# Altium PCB Grabber_DIOT.PCBDOC (part 3 of 7)
Units mm, origin at the board's own origin, x right, y up, seen from the top; angles counter-clockwise.
Board outline 221.14 x 100 mm, 4 copper layers (TopLayer, MidLayer1, Internal layer GND, Bottom Layer), stack 1.607 mm thick; 234 components, 170 nets, 1025 pads, 389 vias.
Unrouted connection lines stored in the file: 2.
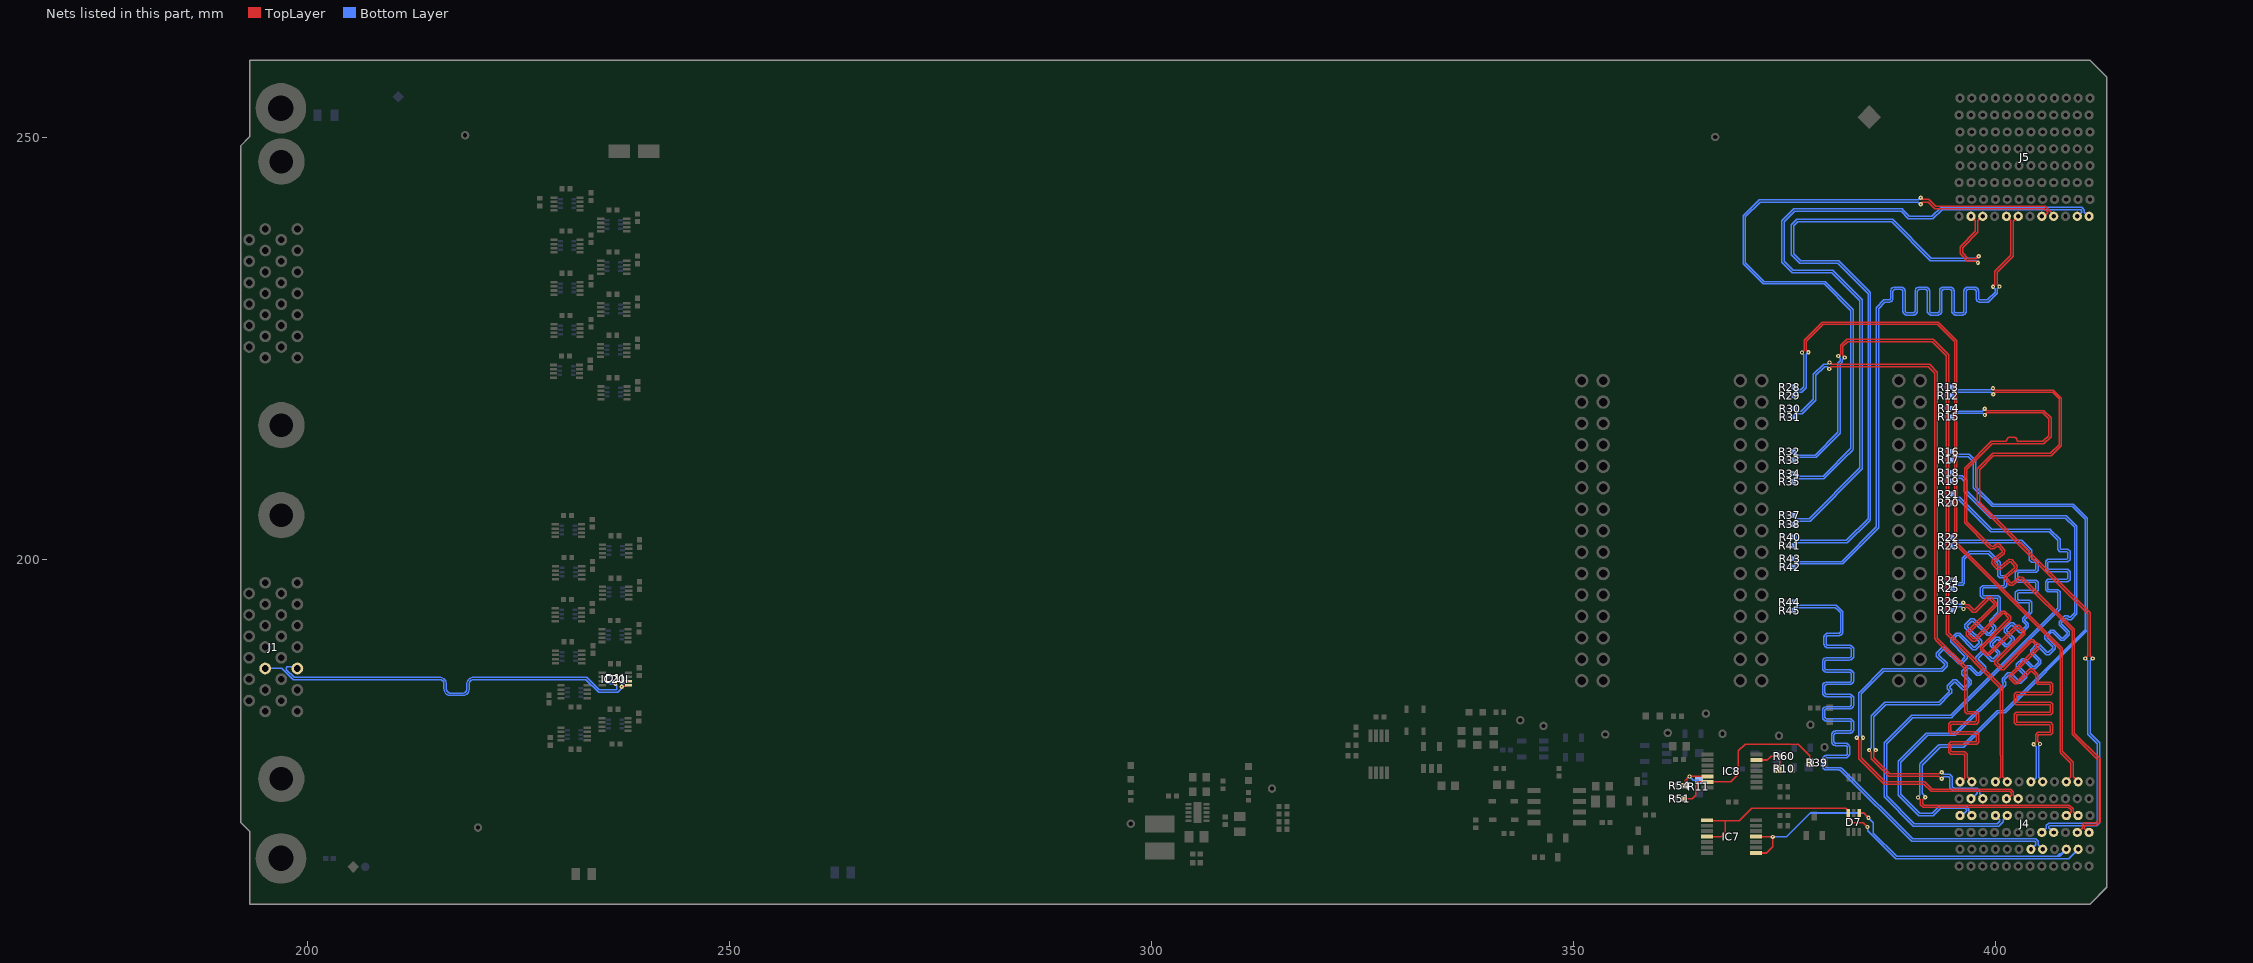
[diagram p4: the nets of this part, all layers, seen from the top]

## Via types
v1: diameter 0.5, hole 0.2, TopLayer to Bottom Layer, tented both sides, 374 vias
v2: diameter 0.8, hole 0.5, TopLayer to Bottom Layer, tented both sides, 15 vias

## Nets (pads, with @x,y where several pads share a name; then routed paths per layer and width w, separated by ;. In a path a pad name is that pad's centre, name@x,y a point inside that pad or via, vN(x,y) a via of type N, cw(c..) or ccw(c..) an arc to the next point about the centre after c; other vN are vias at no path point) (continued)
BP_IO.LVDS_P4: (continued)
  Bottom Layer w0.152: R20.2@394.945,206.732 395.158,206.946 395.158,206.996 395.248,207.085 395.709,207.085 399.487,203.307 406.388,203.307 407.413,202.282 407.413,201.457 407.413,201.183 407.668,200.928 408.509,200.928 408.6,200.837 408.6,200.105 408.509,200.014 406.221,200.014 405.966,199.759 405.966,198.796 406.221,198.541 408.509,198.541 408.6,198.449 408.6,197.718 408.509,197.626 406.234,197.626 405.979,197.371 405.979,196.408 406.234,196.153 407.321,196.153 407.413,196.062 407.413,194.244 406.738,193.569 394.712,181.543 390.122,181.543 386.853,178.273 386.853,171.867 390.304,168.415 400.415,168.415 400.932,168.933 400.932,169.158 J4.H4@401.432,169.657
BP_IO.LVDS_P5: J4.J5 R22.2 | length 84.8
  TopLayer w0.152: v1(385.853,177.409) 385.853,177.4 385.598,177.146 385.598,176.509 387.509,174.598 393.403,174.598 393.585,174.78 v1(393.666,174.78)
  Bottom Layer w0.152: v1(385.853,177.409) 385.853,177.418 385.598,177.672 385.598,181.368 387.034,182.804 393.424,182.804 394.648,184.028 394.841,184.221 394.841,184.582 394.625,184.799 394.625,184.928 395.142,185.445 395.272,185.445 396.151,184.566 396.511,184.566 397.192,185.247 397.192,185.608 396.313,186.487 396.313,186.616 396.83,187.133 396.96,187.133 397.839,186.254 398.2,186.254 398.881,186.935 398.881,187.296 398.002,188.175 398.002,188.304 398.519,188.822 398.648,188.822 399.527,187.943 399.888,187.943 400.569,188.624 400.569,188.984 399.69,189.863 399.69,189.993 400.207,190.51 400.336,190.51 401.215,189.631 401.576,189.631 402.257,190.312 402.257,190.673 401.378,191.552 401.378,191.681 401.895,192.198 402.025,192.198 402.904,191.319 403.264,191.319 403.945,192 403.945,192.361 403.528,192.779 403.528,192.908 403.658,193.038 404.336,193.717 404.336,194.637 404.336,194.911 404.081,195.166 402.78,195.166 402.689,195.257 402.689,195.989 402.78,196.08 404.856,196.08 405.111,196.335 405.111,197.298 404.856,197.553 402.78,197.553 402.689,197.645 402.689,198.376 402.78,198.468 404.856,198.468 405.111,198.723 405.111,199.686 404.856,199.941 404.428,199.941 404.336,200.032 404.336,200.357 404.336,201.073 403.155,202.254 395.345,202.254 395.174,202.425 395.158,202.425 394.945,202.639 R22.2@394.945,202.659 ; v1(393.666,174.78) 393.699,174.78 393.929,174.551 394.648,174.551 394.943,174.256 394.943,173.071 395.148,172.867 397.875,172.867 398.185,172.557 398.185,172.22 398.532,171.874 J4.J5@398.532,171.657
BP_IO.LVDS_P6: J4.G5 R24.2 | length 84.8
  TopLayer w0.152: v1(384.354,178.864) 384.354,178.843 384.112,178.6 384.112,176.506 386.982,173.637 391.683,173.637 392.519,172.8 401.873,172.8 402.172,172.502 402.172,172.072 402.586,171.657 J4.G5@402.732,171.657
  Bottom Layer w0.152: v1(384.354,178.864) 384.354,178.884 384.112,179.127 384.112,184.07 386.783,186.741 393.71,186.741 394.106,187.137 394.3,187.331 394.3,187.692 393.327,188.665 393.327,188.794 393.844,189.311 393.973,189.311 395.659,187.625 396.02,187.625 396.701,188.306 396.701,188.667 395.015,190.353 395.015,190.482 395.532,191 395.662,191 397.348,189.314 397.708,189.314 398.389,189.995 398.389,190.355 396.703,192.041 396.703,192.171 397.221,192.688 397.35,192.688 399.036,191.002 399.397,191.002 400.078,191.683 400.078,192.044 399.61,192.512 399.61,192.641 400.454,193.485 400.597,193.628 400.597,195.179 400.597,195.452 400.342,195.708 398.615,195.708 398.524,195.799 398.524,196.53 398.615,196.622 401.12,196.622 401.375,196.877 401.375,197.84 401.12,198.095 400.688,198.095 400.597,198.187 400.597,199.676 400.597,199.693 399.311,200.978 396.938,200.978 396.078,200.117 396.078,197.277 396.024,197.223 395.248,197.223 395.158,197.313 395.158,197.352 R24.2@394.945,197.566
BP_IO.LVDS_P7: J4.E6 R26.2 | length 85.1
  TopLayer w0.152: v1(396.227,194.877) 396.247,194.877 396.49,194.634 396.847,194.634 397.338,194.143 397.45,194.031 397.579,194.031 399.115,195.566 399.475,195.566 400.156,194.886 400.156,194.525 396.869,191.237 396.869,191.108 397.386,190.591 397.515,190.591 400.803,193.878 401.164,193.878 401.845,193.197 401.845,192.836 398.557,189.549 398.557,189.42 399.074,188.902 399.204,188.902 402.491,192.19 402.852,192.19 403.533,191.509 403.533,191.148 400.245,187.861 400.245,187.731 400.763,187.214 400.892,187.214 404.18,190.502 404.54,190.502 405.221,189.821 405.221,189.46 401.934,186.172 401.934,186.043 402.451,185.526 402.58,185.526 404.087,187.033 404.448,187.033 404.888,186.593 405.072,186.409 405.072,185.717 405.072,185.559 405.164,185.468 406.562,185.468 406.817,185.213 406.817,184.25 406.562,183.994 402.633,183.994 402.541,183.903 402.541,183.171 402.633,183.08 406.562,183.08 406.817,182.825 406.817,181.862 406.562,181.607 402.633,181.607 402.541,181.515 402.541,180.784 402.633,180.692 406.562,180.692 406.817,180.437 406.817,179.474 406.562,179.219 405.164,179.219 405.072,179.128 405.072,178.767 405.072,178.471 405.32,178.223 v1(405.32,178.129) ; J4.E6@405.555,173.982 405.555,173.735 J4.E6@405.632,173.657
  Bottom Layer w0.152: R26.2@394.859,195.11 395.301,194.668 395.964,194.668 396.172,194.877 v1(396.227,194.877) ; v1(405.32,178.129) 405.32,178.035 405.174,177.89 405.174,174.174 405.364,173.985 405.54,173.985 405.54,173.749 405.632,173.749 J4.E6@405.632,173.657
BP_IO.LVDS_P8: J4.B6 R28.2 | length 85.3
  TopLayer w0.152: v1(377.114,224.522) 377.114,224.547 377.353,224.786 377.353,225.985 379.497,228.13 393.256,228.13 395.467,225.919 395.467,201.975 407.967,189.475 407.967,177.258 409.241,175.984 409.241,174.248 J4.B6@409.832,173.657
  Bottom Layer w0.152: R28.2@376.146,220.417 376.351,220.212 376.351,220.187 376.441,220.098 376.974,220.098 377.333,220.457 377.333,222.646 377.34,222.653 377.34,224.259 377.114,224.485 v1(377.114,224.522)
BP_IO.LVDS_P9: J4.K6 R30.2 | length 84.3
  TopLayer w0.152: v1(380.362,223.347) 380.408,223.347 380.625,223.13 386.236,223.13 392.222,223.13 393.157,222.194 393.157,190.66 396.674,187.143 396.674,182.373 396.674,182.064 396.765,181.972 397.799,181.972 398.054,181.717 398.054,180.754 397.799,180.499 394.853,180.499 394.762,180.408 394.762,179.676 394.853,179.585 397.799,179.585 398.054,179.33 398.054,178.367 397.799,178.112 394.853,178.112 394.762,178.02 394.762,177.289 394.853,177.197 396.418,177.197 396.674,176.942 396.674,176.668 ; 396.675,176.667 396.675,174.263 397.232,173.706 J4.K6@397.232,173.657
  Bottom Layer w0.152: R30.2@375.974,217.888 376.179,217.888 376.399,217.668 376.399,217.626 376.488,217.536 377.04,217.536 378.471,218.967 378.471,221.918 379.672,223.12 380.099,223.12 380.326,223.347 v1(380.362,223.347)
BP_IO.LVDS_P10: J4.H6 R32.2 | length 84.5
  TopLayer w0.152: v1(381.401,224.1) 381.416,224.1 381.679,224.363 381.679,225.372 382.39,226.083 392.637,226.083 394.493,224.227 394.493,191.294 400.908,184.879 400.908,176.934 400.912,176.93 400.912,174.252 401.432,173.732 J4.H6@401.432,173.657
  Bottom Layer w0.152: R32.2@376.127,212.789 376.127,212.769 376.341,212.555 376.356,212.555 376.545,212.367 378.668,212.367 381.354,215.052 381.354,223.276 381.621,223.543 381.621,223.821 381.401,224.041 v1(381.401,224.1)
BP_IO.LVDS_P11: J5.D1 R34.2 | length 84.2
  TopLayer w0.152: v1(391.173,242.87) 391.247,242.87 391.436,242.681 392.118,242.681 392.196,242.603 392.201,242.603 392.964,241.841 405.944,241.841 405.946,241.839 406.533,241.252 406.535,241.252 406.931,240.856 J5.D1@406.931,240.658
  Bottom Layer w0.152: R34.2@376.098,210.198 376.098,210.184 376.432,209.849 379.603,209.849 382.915,213.162 382.915,229.488 379.752,232.652 372.502,232.652 370.124,235.03 370.124,240.733 372.02,242.629 390.88,242.629 391.079,242.827 391.079,242.87 v1(391.173,242.87)
BP_IO.LVDS_P12: J5.A1 R37.2 | length 84.7
  Bottom Layer w0.152: R37.2@376.268,205.201 376.366,205.103 376.366,204.925 376.455,204.835 377.953,204.835 383.967,210.849 383.967,230.631 380.627,233.972 375.952,233.972 374.717,235.206 374.717,240.131 376.118,241.532 376.235,241.532 388.852,241.532 388.969,241.532 389.135,241.367 389.845,240.657 392.51,240.657 393.595,241.742 410.235,241.742 410.312,241.665 410.318,241.665 410.577,241.406 410.577,241.159 411.078,240.658 J5.A1@411.131,240.658
BP_IO.LVDS_P13: J5.J1 R40.2 | length 83.6
  TopLayer w0.152: v1(398.056,235.925) 397.962,235.925 397.684,235.648 396.838,235.648 396.131,236.354 396.131,236.928 397.95,238.747 397.95,240.155 398.453,240.658 J5.J1@398.531,240.658
  Bottom Layer w0.152: R40.2@376.121,202.813 376.374,202.56 376.374,202.346 376.463,202.257 382.368,202.257 384.942,204.831 384.942,231.486 381.327,235.102 376.852,235.102 375.838,236.116 375.838,239.647 376.477,240.286 376.592,240.286 387.842,240.286 392.429,235.699 397.793,235.699 398.019,235.925 v1(398.056,235.925)
BP_IO.LVDS_P14: J5.G1 R42.2 | length 82
  TopLayer w0.152: v1(400.516,232.33) 400.254,232.593 400.254,234.046 402.129,235.922 402.129,240.056 J5.G1@402.731,240.658
  Bottom Layer w0.152: R42.2@376.185,199.015 376.399,199.229 376.399,199.384 376.488,199.474 381.918,199.474 386.197,203.753 386.197,229.726 386.94,230.469 387.164,230.469 387.38,230.469 ccw(c387.38,230.982) 387.893,230.982 387.893,231.759 cw(c388.126,231.759) 388.126,231.993 388.827,231.993 cw(c388.827,231.759) 389.061,231.759 389.061,229.458 ccw(c389.574,229.458) 389.574,228.945 390.275,228.945 ccw(c390.275,229.458) 390.788,229.458 390.788,231.759 cw(c391.022,231.759) 391.022,231.993 391.723,231.993 cw(c391.723,231.759) 391.957,231.759 391.957,229.458 ccw(c392.47,229.458) 392.47,228.945 393.171,228.945 ccw(c393.171,229.458) 393.684,229.458 393.684,231.759 cw(c393.918,231.759) 393.918,231.993 394.619,231.993 cw(c394.619,231.759) 394.852,231.759 394.852,229.458 ccw(c395.365,229.458) 395.365,228.945 396.066,228.945 ccw(c396.066,229.458) 396.58,229.458 396.58,231.759 cw(c396.813,231.759) 396.813,231.993 397.514,231.993 cw(c397.514,231.759) 397.748,231.759 397.748,230.982 ccw(c398.261,230.982) 398.261,230.469 399.084,230.469 399.2,230.469 400.269,231.538 400.269,231.654 400.269,232.067 400.516,232.314 v1(400.516,232.33)
BP_IO.LVDS_P15: J4.E2 R44.2 | length 84
  Bottom Layer w0.152: R44.2@376.139,194.948 376.139,194.923 376.353,194.709 376.398,194.709 376.522,194.586 381.162,194.586 381.777,193.971 381.961,193.787 381.961,191.492 cw(c381.447,191.492) 381.447,190.979 380.217,190.979 ccw(c380.217,190.746) 379.983,190.746 379.983,190.045 ccw(c380.217,190.045) 380.217,189.811 382.728,189.811 cw(c382.728,189.298) 383.241,189.298 383.241,188.597 cw(c382.728,188.597) 382.728,188.084 380.057,188.084 ccw(c380.057,187.85) 379.823,187.85 379.823,187.149 ccw(c380.057,187.149) 380.057,186.915 382.728,186.915 cw(c382.728,186.402) 383.241,186.402 383.241,185.701 cw(c382.728,185.701) 382.728,185.188 380.057,185.188 ccw(c380.057,184.954) 379.823,184.954 379.823,184.253 ccw(c380.057,184.253) 380.057,184.02 382.728,184.02 cw(c382.728,183.507) 383.241,183.507 383.241,182.806 cw(c382.728,182.806) 382.728,182.292 380.057,182.292 ccw(c380.057,182.059) 379.823,182.059 379.823,181.358 ccw(c380.057,181.358) 380.057,181.124 382.728,181.124 cw(c382.728,180.611) 383.241,180.611 383.241,179.91 cw(c382.728,179.91) 382.728,179.397 381.128,179.397 ccw(c381.128,179.163) 380.894,179.163 380.894,178.462 ccw(c381.128,178.462) 381.128,178.228 382.243,178.228 cw(c382.243,177.715) 382.756,177.715 382.756,177.014 cw(c382.243,177.014) 382.243,176.501 380.057,176.501 ccw(c380.057,176.268) 379.823,176.268 379.823,175.567 ccw(c380.057,175.567) 380.057,175.333 381.438,175.333 cw(c381.438,174.556) 381.987,175.105 382.191,174.901 382.302,174.791 390.214,166.878 404.795,166.878 405.077,166.596 405.077,166.204 405.624,165.657 J4.E2@405.632,165.657
CC0_N: D1I.6 IC20I.5 J1.18 | length 47.8
  TopLayer w0.152: v1(237.274,184.921) 237.34,184.987 237.679,184.987 237.776,185.085 IC20I.5@238.051,185.085
  Bottom Layer w0.152: J1.18@195.016,187.079 195.04,187.103 196.977,187.103 197.412,186.668 198.167,185.913 198.331,185.749 212.775,185.749 215.709,185.749 cw(c215.709,185.261) 216.196,185.261 216.196,184.654 ccw(c216.964,184.654) 216.964,183.887 218.427,183.887 ccw(c218.427,184.654) 219.194,184.654 219.194,185.261 cw(c219.681,185.261) 219.681,185.749 221.092,185.749 233.01,185.749 234.512,184.247 236.791,184.247 237.207,184.663 237.207,184.854 v1(237.274,184.921) ; v1@237.291,184.921 D1I.6@237.291,185.41
CC0_P: D1I.1 IC20I.6 J1.5 | length 47.7
  TopLayer w0.152: v1(236.512,185.277) 236.573,185.277 236.881,185.585 IC20I.6@238.051,185.585
  Bottom Layer w0.152: J1.5@198.826,187.216 198.772,187.271 197.617,187.271 197.528,187.181 197.528,186.947 198.447,186.028 212.775,186.028 215.709,186.028 cw(c215.709,185.261) 216.476,185.261 216.476,184.654 ccw(c216.964,184.654) 216.964,184.166 218.427,184.166 ccw(c218.427,184.654) 218.914,184.654 218.914,185.261 cw(c219.681,185.261) 219.681,186.028 221.092,186.028 233.126,186.028 234.614,184.54 236.67,184.54 236.67,185.024 236.512,185.182 v1(236.512,185.277) 235.844,185.277 D1I.1@235.711,185.41